# EAGLE board potentiometer (EAGLE 6.3)
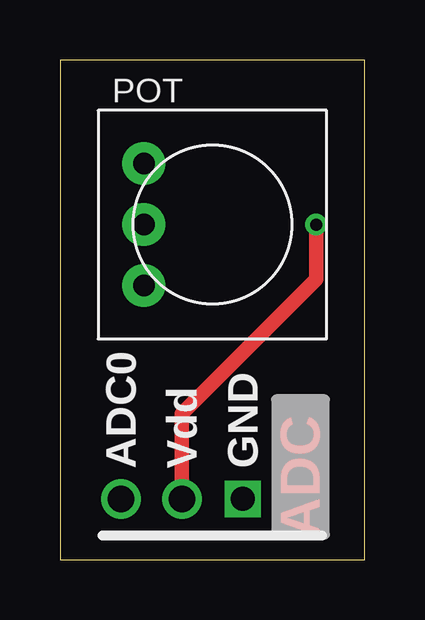
[diagram p0: board, top side]
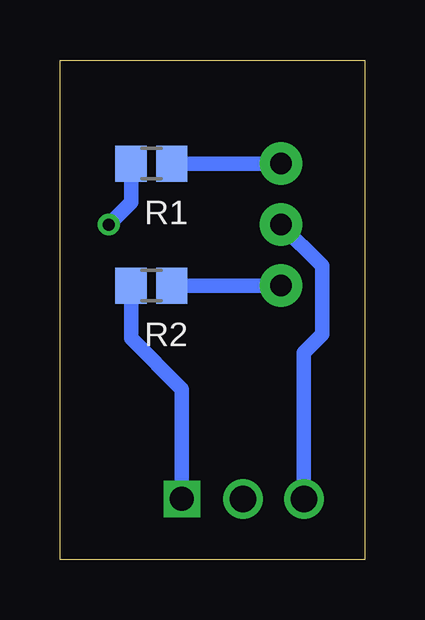
[diagram p1: board, bottom side, seen from below]

Size 12.7 x 20.83 mm. Coordinates in mm from the lower left corner, seen from the top.
Outline: 0,0 12.7,0 12.7,20.83 0,20.83 0,0
Copper layers (1*16): Top 0.035mm / dielectric 1.5mm / Bottom 0.035mm
Design rules "default": minimum track width 10mil, minimum drill 24mil, track to track 8mil, track to pad 8mil, pad to pad 8mil, via to via 8mil, smd to smd 8mil, copper to edge 40mil, drill to drill 8mil, minimum pad ring 10mil, minimum via ring 8mil, stop-mask expansion 4mil, vias tented up to drill 0mil, thermal gap 10mil

## Footprints (pad centres in the part's own frame; a part is rotated, then mirrored left to right if it is on the bottom)
TRIM-3386 = drill 0.9 pad 1.778: 1 -2.54,-2.857; 2 0,-2.857; 3 2.54,-2.857
R0805 = smd 1.3 x 1.5: 1 -0.85,0; 2 0.85,0
VIVA-HEADER-ADC-RA-2 = drill 1 square: 1 0,0 | drill 1.1: 2 2.54,0; 3 5.08,0

## Placement (x,y rotation side)
POT  [TRIM-3386]  6.35,13.97 270 top
R1  [R0805]  8.89,16.51 180 bottom
R2  [R0805]  8.89,11.43 0 bottom
U$1  VIVA-HEADER-ADC-1  [VIVA-HEADER-ADC-RA-2]  7.62,2.54 180 top

## Library data of the parts
POT R1 R2 U$1 = nolan-utsa

## Nets
ADC: POT.2 U$1.3
GND: R2.1 U$1.1
N$1: POT.1 R1.1
N$2: POT.3 R2.2
VDD: R1.2 U$1.2

## Tracks (layer width: path | path; a pad name or v marks a point on that pad's centre or on a via)
ADC
  Bottom 0.61: POT.2 1.78,12.26 1.78,9.4 2.54,8.64 U$1.3
GND
  Bottom 0.61: U$1.1 7.62,7.11 9.74,9.23 R2.1
N$1
  Bottom 0.61: POT.1 R1.1
N$2
  Bottom 0.61: POT.3 R2.2
VDD  (via drill 0.5)
  Top 0.61: U$1.2 5.08,6.1 10.67,11.68 v10.67,13.97
  Bottom 0.61: v10.67,13.97 9.74,14.9 R1.2